# Altium PCB upBusSim.PcbDoc
Units mil, origin at the board's own origin, x right, y up, seen from the top; angles counter-clockwise.
Board outline 8772.5 x 6000.62 mil, 2 copper layers (Top Layer, Bottom Layer); 127 components, 134 nets, 554 pads, 0 vias.
Unrouted connection lines stored in the file: 187.
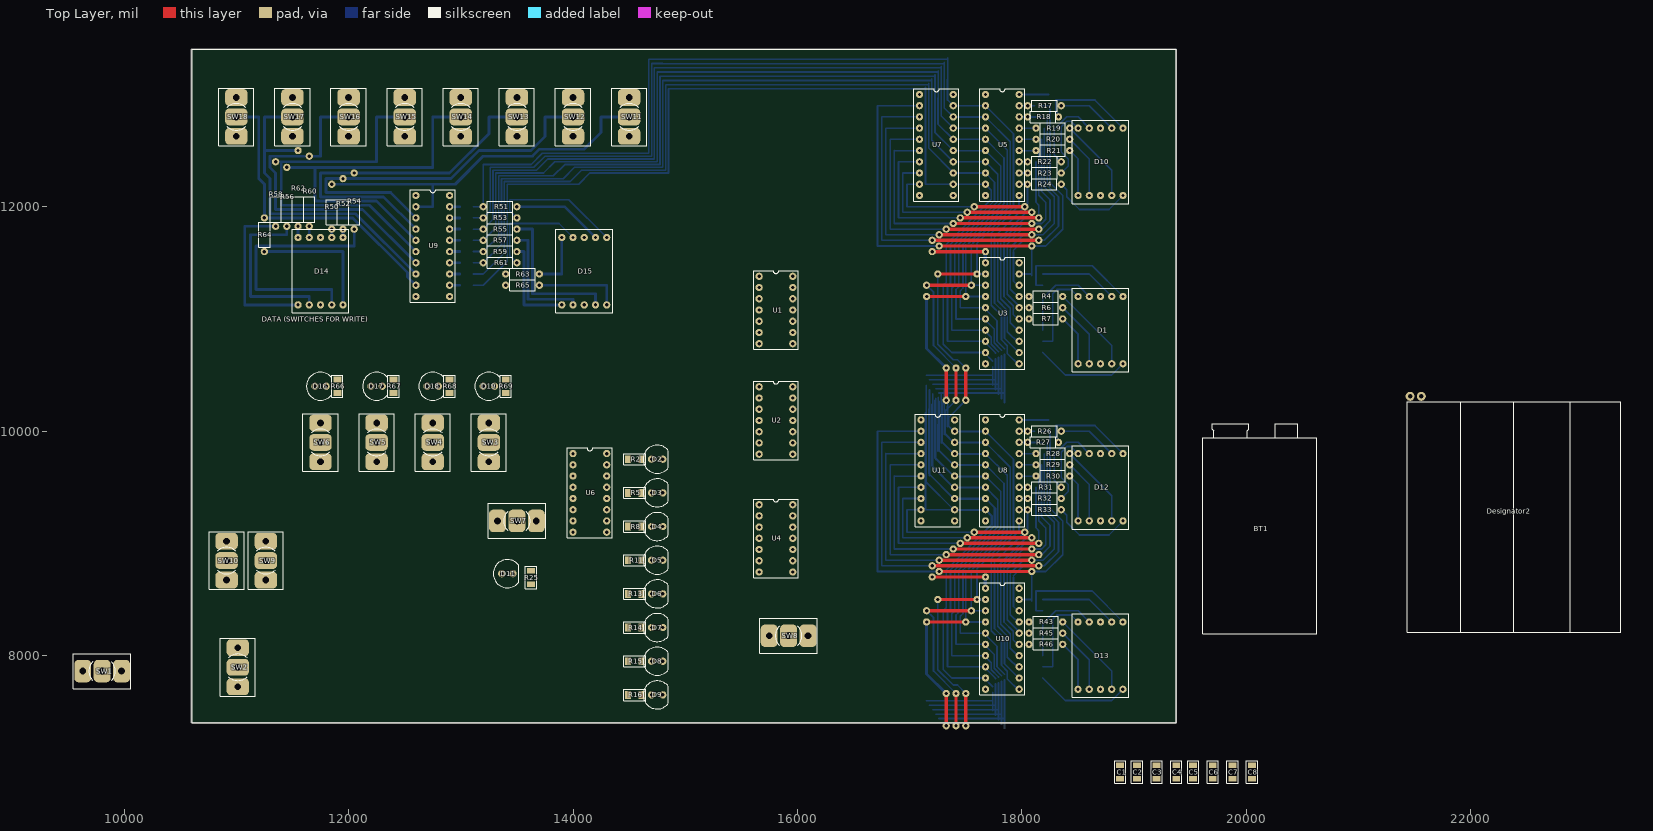
[diagram p0: Top Layer view]
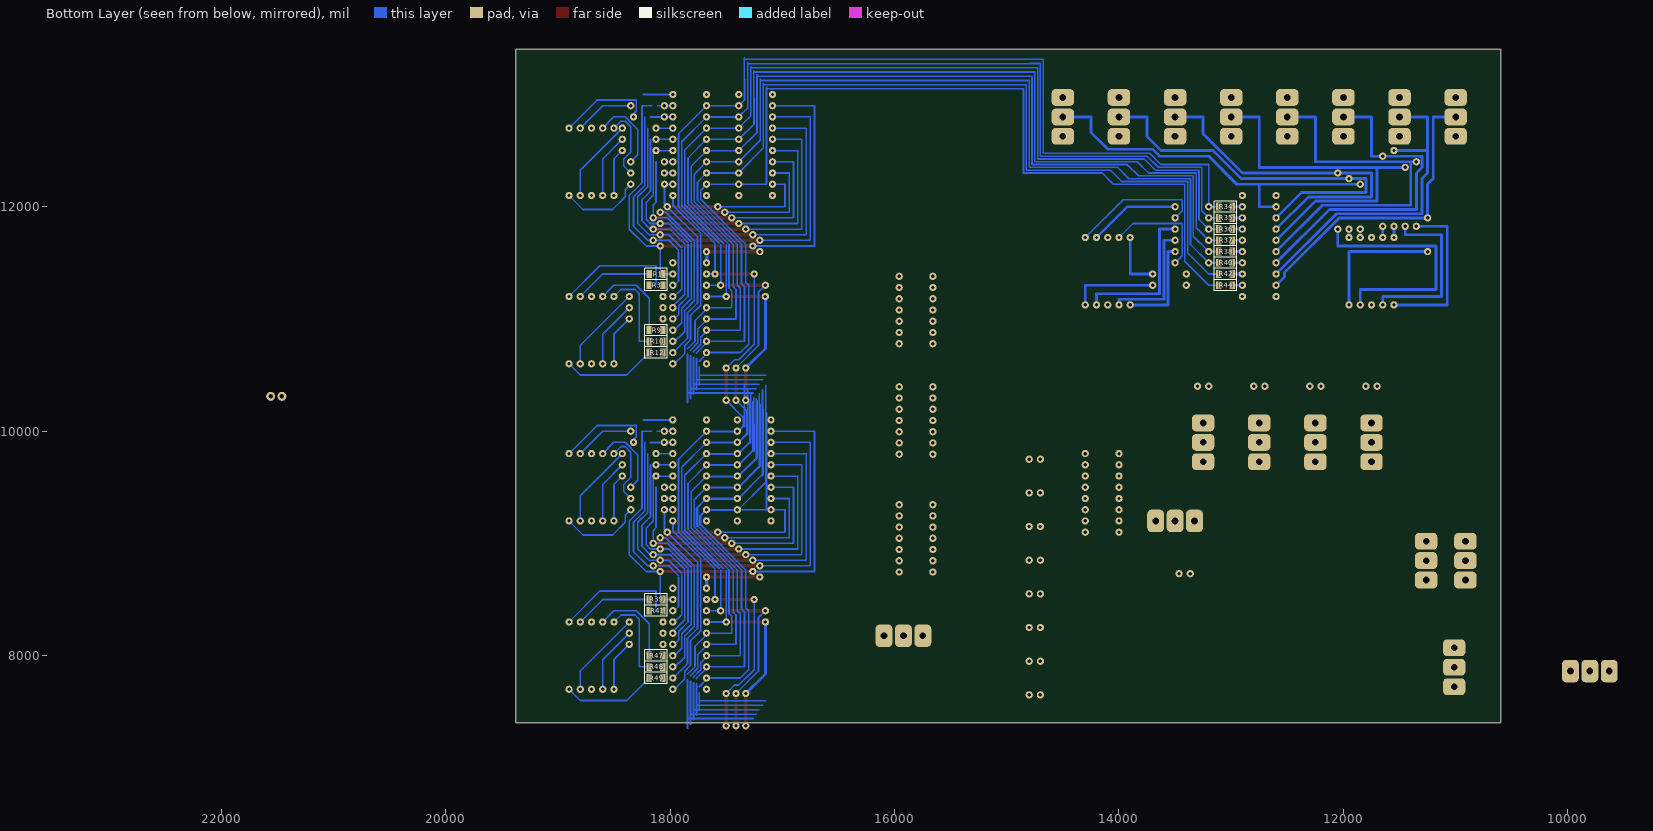
[diagram p1: Bottom Layer view, seen from below]

## Layer stack, top to bottom
Top Layer: signal copper 1.4
Dielectric: dielectric 12.6, FR-4, Dk 4.8
Bottom Layer: signal copper 1.4

## Board outline
10600,7400 19372.5,7402.5 19372.5,13400.62 10600,13400.62

## Design rules (kind name [scope] priority, off if disabled: settings)
Clearance [All] p1: gap=10
PolygonConnect [All] p1: connectstyle=Relief reliefconductorwidth=10 reliefentries=4 polygonreliefangle="90 Angle"
RoutingVias [All] p1: holewidth=28 width=50 viastyle="Through Hole" minholewidth=28 minwidth=50 maxholewidth=28 maxwidth=50
SilkscreenOverComponentPads [All] p1: minsilkscreentomaskgap=10
SolderMaskExpansion [All] p1: expansion=4
Width [All] p1: maxlimit=300 minlimit=10 preferedwidth=20
27 further rules are at their usual default settings.

## Components (designator, comment, footprint, x,y, rotation, side; value= is the part's Value field where it differs from the comment)
BT1 "Battery 9V" BAT_9V 19608.75,10066.88 r0 top
C1 "Cap" c1206 18875,6962.5 r90 top
C2 "Cap" c1206 19025,6962.5 r90 top
C3 "Cap" c1206 19200,6962.5 r90 top
C4 "Cap" c1206 19375,6962.5 r90 top
C5 "Cap" c1206 19525,6962.5 r90 top
C6 "Cap" c1206 19700,6962.5 r90 top
C7 "Cap" c1206 19875,6962.5 r90 top
C8 "Cap" c1206 20050,6962.5 r90 top
D1 "DISP7CC" DISP7 18700,10900 r0 top
D2 "LED" "LED5mm ROJO" 14750,9750 r0 top
D3 "LED" "LED5mm ROJO" 14750,9450 r0 top
D4 "LED" "LED5mm ROJO" 14750,9150 r0 top
D5 "LED" "LED5mm ROJO" 14750,8850 r0 top
D6 "LED" "LED5mm ROJO" 14750,8550 r0 top
D7 "LED" "LED5mm ROJO" 14750,8250 r0 top
D8 "LED" "LED5mm ROJO" 14750,7950 r0 top
D9 "LED" "LED5mm ROJO" 14750,7650 r0 top
D10 "DISP7CC" DISP7 18700,12400 r0 top
D11 "LED" "LED5mm ROJO" 13415,8730 r0 top
D12 "DISP7CC" DISP7 18700,9500 r0 top
D13 "DISP7CC" DISP7 18699.38,7999.38 r0 top
D14 "DISP7CC" DISP7 11750,11425 r0 top
D15 "DISP7CC" DISP7 14100,11425 r0 top
D16 "LED" "LED5mm ROJO" 11750,10400 r0 top
D17 "LED" "LED5mm ROJO" 12250,10400 r0 top
D18 "LED" "LED5mm ROJO" 12750,10400 r0 top
D19 "LED" "LED5mm ROJO" 13250,10400 r0 top
Designator2 "Comment" BAT_4AAA 21433.12,10185 r0 top
R1 "Res" R1206 18125,11400 r0 bottom
R2 "Res" R1206 14550,9750 r180 top
R3 "Res" R1206 18125,11300 r0 bottom
R4 "Res" RES300TH#1 18212.5,11200 r0 top
R5 "Res" R1206 14550,9450 r180 top
R6 "Res" RES300TH#1 18212.5,11100 r0 top
R7 "Res" RES300TH#1 18212.5,11000 r0 top
R8 "Res" R1206 14550,9150 r180 top
R9 "Res" R1206 18125,10900 r0 bottom
R10 "Res" R1206 18125,10800 r0 bottom
R11 "Res" R1206 14550,8850 r180 top
R12 "Res" R1206 18125,10700 r0 bottom
R13 "Res" R1206 14550,8550 r180 top
R14 "Res" R1206 14550,8250 r180 top
R15 "Res" R1206 14550,7950 r180 top
R16 "Res" R1206 14550,7650 r180 top
R17 "Res" RES300TH#1 18200,12900 r0 top
R18 "Res" RES300TH#2 18187.5,12800 r0 top
R19 "Res" RES300TH#1 18275,12700 r0 top
R20 "Res" RES300TH#1 18275,12600 r0 top
R21 "Res" RES300TH#1 18275,12500 r0 top
R22 "Res" RES300TH#1 18200,12400 r0 top
R23 "Res" RES300TH#1 18200,12300 r0 top
R24 "Res" RES300TH#3 18199.38,12199.38 r0 top
R25 "Res" R1206 13625,8695 r90 top
R26 "Res" RES300TH#1 18200,10000 r0 top
R27 "Res" RES300TH#2 18187.5,9900 r0 top
R28 "Res" RES300TH#1 18275,9800 r0 top
R29 "Res" RES300TH#1 18275,9700 r0 top
R30 "Res" RES300TH#1 18275,9600 r0 top
R31 "Res" RES300TH#1 18200,9500 r0 top
R32 "Res" RES300TH#1 18200,9400 r0 top
R33 "Res" RES300TH#1 18200,9300 r0 top
R34 "Res" R1206 13050,12000 r0 bottom
R35 "Res" R1206 13050,11900 r0 bottom
R36 "Res" R1206 13050,11800 r0 bottom
R37 "Res" R1206 13050,11700 r0 bottom
R38 "Res" R1206 13050,11600 r0 bottom
R39 "Res" R1206 18125,8500 r0 bottom
R40 "Res" R1206 13050,11500 r0 bottom
R41 "Res" R1206 18125,8400 r0 bottom
R42 "Res" R1206 13050,11400 r0 bottom
R43 "Res" RES300TH#1 18212.5,8300 r0 top
R44 "Res" R1206 13050,11300 r0 bottom
R45 "Res" RES300TH#1 18212.5,8200 r0 top
R46 "Res" RES300TH#1 18212.5,8100 r0 top
R47 "Res" R1206 18125,8000 r0 bottom
R48 "Res" R1206 18125,7900 r0 bottom
R49 "Res" R1206 18125,7800 r0 bottom
R50 "Res" RES300TH#4 11850,11950 r270 top
R51 "Res" RES300TH#1 13350,12000 r0 top
R52 "Res" RES300TH#5 11950,11950 r270 top
R53 "Res" RES300TH#1 13350,11900 r0 top
R54 "Res" RES300TH#6 12050,11950 r270 top
R55 "Res" RES300TH#1 13350,11800 r0 top
R56 "Res" RES300TH#7 11450,11975 r270 top
R57 "Res" RES300TH#1 13350,11700 r0 top
R58 "Res" RES300TH#8 11350,11975 r270 top
R59 "Res" RES300TH#1 13350,11600 r0 top
R60 "Res" RES300TH#9 11650,11975 r270 top
R61 "Res" RES300TH#1 13350,11500 r0 top
R62 "Res" RES300TH#10 11550,11975 r270 top
R63 "Res" RES300TH#1 13550,11400 r0 top
R64 "Res" RES300TH#1 11250,11750 r270 top
R65 "Res" RES300TH#1 13550,11300 r0 top
R66 "Res" R1206 11900,10400 r270 top
R67 "Res" R1206 12400,10400 r270 top
R68 "Res" R1206 12900,10400 r270 top
R69 "Res" R1206 13400,10400 r270 top
SW1 "SW2C" SW_PAL_1P2T_PCB 9804.38,7861.88 r90 top
SW2 "SW2C" SW_PAL_1P2T_PCB 11013.12,7896.25 r180 top
SW3 "SW2C" SW_PAL_1P2T_PCB 13250,9900 r180 top
SW4 "SW2C" SW_PAL_1P2T_PCB 12750,9900 r180 top
SW5 "SW2C" SW_PAL_1P2T_PCB 12250,9900 r180 top
SW6 "SW2C" SW_PAL_1P2T_PCB 11750,9900 r180 top
SW7 "SW2C" SW_PAL_1P2T_PCB 13500,9200 r90 top
SW8 "SW2C" SW_PAL_1P2T_PCB 15920.62,8176.88 r90 top
SW9 "SW2C" SW_PAL_1P2T_PCB 11263.12,8846.25 r180 top
SW10 "SW2C" SW_PAL_1P2T_PCB 10913.12,8846.25 r180 top
SW11 "SW2C" SW_PAL_1P2T_PCB 14500,12800 r180 top
SW12 "SW2C" SW_PAL_1P2T_PCB 14000,12800 r180 top
SW13 "SW2C" SW_PAL_1P2T_PCB 13500,12800 r180 top
SW14 "SW2C" SW_PAL_1P2T_PCB 13000,12800 r180 top
SW15 "SW2C" SW_PAL_1P2T_PCB 12500,12800 r180 top
SW16 "SW2C" SW_PAL_1P2T_PCB 12000,12800 r180 top
SW17 "SW2C" SW_PAL_1P2T_PCB 11500,12800 r180 top
SW18 "SW2C" SW_PAL_1P2T_PCB 11000,12800 r180 top
U1 "74HC04" DIP14Z 15658.12,11379.38 r0 top
U2 "74HC00" DIP14Z 15658.12,10395 r0 top
U3 "74HC573" DIP20Z 17675,11500 r0 top
U4 "74HC08" DIP14Z 15658.12,9345 r0 top
U5 "74HC573" DIP20Z 17675,13000 r0 top
U6 "74HC138" DIP16Z 14000,9800 r0 top
U7 "74HC573" DIP20Z 17087.5,13000 r0 top
U8 "74HC573" DIP20Z 17675,10100 r0 top
U9 "74HC573" DIP20Z 12600,12100 r0 top
U10 "74HC573" DIP20Z 17675,8600 r0 top
U11 "74HC573" DIP20Z 17100,10100 r0 top

## Footprints (in the part's own frame and the unit in brackets; to place one, negate y for a bottom-side part, rotate by r counter-clockwise, add the part's x,y. Pads: shape width x height; smd on the part's side, far side on the other; paste and mask are expansions set on the pad)
BAT_4AAA [mil]
  round 80 hole 40: 1(25,125) 2(125,125)
  silkscreen extent 0,-1975 1900,75
BAT_9V [mil]
  silkscreen extent 0,-1874 1016,0, body extent 0,-1874 1016,0, height 656
c1206 [mil]
  rect 50x70 smd: 1(-60,0) 2(60,0)
  silkscreen extent -100,-50 100,50, body extent -63,-31 63,32, height 33
DIP14Z [mil] "ZOCALO DIP14"
  round 65 hole 30: 1(0,0) 2(0,-100) 3(0,-200) 4(0,-300) 5(0,-400) 6(0,-500) 7(0,-600) 8(300,-600) 9(300,-500) 10(300,-400) 11(300,-300) 12(300,-200) 13(300,-100) 14(300,0)
  silkscreen extent -50,-650 350,50, body extent -47,-650 347,50, height 200
DIP16Z [mil] "ZOCALO DIP16"
  round 65 hole 30: 1(0,0) 2(0,-100) 3(0,-200) 4(0,-300) 5(0,-400) 6(0,-500) 7(0,-600) 8(0,-700) 9(300,-700) 10(300,-600) 11(300,-500) 12(300,-400) 13(300,-300) 14(300,-200) 15(300,-100) 16(300,0)
  silkscreen extent -50,-750 350,50, body extent -50,-750 350,50, height 341
DIP20Z [mil]
  round 65 hole 30: 1(0,0) 2(0,-100) 3(0,-200) 4(0,-300) 5(0,-400) 6(0,-500) 7(0,-600) 8(0,-700) 9(0,-800) 10(0,-900) 11(300,-900) 12(300,-800) 13(300,-700) 14(300,-600) 15(300,-500) 16(300,-400) 17(300,-300) 18(300,-200) 19(300,-100) 20(300,0)
  silkscreen extent -50,-950 350,50, body extent -50,-972 350,73, height 326
DISP7 [mil] "DISPLAY 7 SEGMENTOS"
  round 65 hole 30: 1(-200,-300) 2(-100,-300) 3(0,-300) 4(100,-300) 5(200,-300) 6(200,300) 7(100,300) 8(0,300) 9(-100,300) 10(-200,300)
  silkscreen extent -252,-372 252,372, body extent -248,-373 248,375, height 319
"LED5mm ROJO" [mil] "LED 5MM"
  round 65 hole 30: 1(-50,0) 2(50,0)
  silkscreen extent -125,-125 100,125, body extent -116,-116 99,116, height 339
R1206 [mil]
  rect 50x70 smd: 1(-60,0) 2(60,0)
  silkscreen extent -100,-50 100,50, body extent -63,-31 63,31, height 34
RES300TH#1 [mil] "RESISTENCIA THROUGH-HOLE"
  round 65 hole 30: 1(-150,0) 2(150,0)
  silkscreen extent -112,-50 112,50, body extent -159,-47 162,47, height 98
RES300TH#2 [mil] "RESISTENCIA THROUGH-HOLE"
  round 65 hole 30: 1(-137.5,0) 2(137.5,0)
  silkscreen extent -112,-50 112,50, body extent -159,-47 162,47, height 98
RES300TH#3 [mil] "RESISTENCIA THROUGH-HOLE"
  round 65 hole 30: 1(-150,0) 2(150.62,0.62)
  silkscreen extent -112,-50 112,50, body extent -159,-47 162,47, height 98
RES300TH#4 [mil] "RESISTENCIA THROUGH-HOLE"
  round 65 hole 30: 1(-250,0) 2(150,0)
  silkscreen extent -113,-50 113,50, body extent -159,-47 162,47, height 98
RES300TH#5 [mil] "RESISTENCIA THROUGH-HOLE"
  round 65 hole 30: 1(-300,0) 2(150,0)
  silkscreen extent -113,-50 113,50, body extent -159,-47 162,47, height 98
RES300TH#6 [mil] "RESISTENCIA THROUGH-HOLE"
  round 65 hole 30: 1(-350,0) 2(150,0)
  silkscreen extent -113,-50 113,50, body extent -159,-47 162,47, height 98
RES300TH#7 [mil] "RESISTENCIA THROUGH-HOLE"
  round 65 hole 30: 1(-375,0) 2(150,0)
  silkscreen extent -113,-50 113,50, body extent -159,-47 162,47, height 98
RES300TH#8 [mil] "RESISTENCIA THROUGH-HOLE"
  round 65 hole 30: 1(-425,0) 2(150,0)
  silkscreen extent -113,-50 113,50, body extent -159,-47 162,47, height 98
RES300TH#9 [mil] "RESISTENCIA THROUGH-HOLE"
  round 65 hole 30: 1(-475,0) 2(150,0)
  silkscreen extent -113,-50 113,50, body extent -159,-47 162,47, height 98
RES300TH#10 [mil] "RESISTENCIA THROUGH-HOLE"
  round 65 hole 30: 1(-525,0) 2(150,0)
  silkscreen extent -113,-50 113,50, body extent -159,-47 162,47, height 98
SW_PAL_1P2T_PCB [mil] "PADS SEPARADOS 4.4MM"
  rrect50% 200x150 hole 60: 1(0,173.23) 2(0,0) 3(0,-173.23)
  silkscreen extent -157,-257 157,257, body extent -156,-256 159,256, height 1142

## Part data
C1 C2 C3 C4 C5 C6 C7 C8: "Capacitor"
D1 D10 D12 D13 D14 D15: "CC 7-Segment Display"
D2 D3 D4 D5 D6 D7 D8 D9 D11 D16 D17 D18 D19: "Led"
R1 R2 R3 R4 R5 R6 R7 R8 R9 R10 R11 R12 R13 R14 R15 R16 R17 R18 R19 R20 R21 R22 R23 R24 R25 R26 R27 R28 R29 R30 R31 R32 R33 R34 R35 R36 R37 R38 R39 R40 R41 R42 R43 R44 R45 R46 R47 R48 R49 R50 R51 R52 R53 R54 R55 R56 R57 R58 R59 R60 R61 R62 R63 R64 R65 R66 R67 R68 R69: "Resistencia"
SW1 SW2 SW3 SW4 SW5 SW6 SW7 SW8 SW9 SW10 SW11 SW12 SW13 SW14 SW15 SW16 SW17 SW18: "Switch de 2 posiciones"
U1: "Hex Inverter"
U2: "Quad 2-Input NAND Gate"
U3 U5 U7 U8 U9 U10 U11: "Octal Transparent D-Type Latches with 3-State Outputs"
U4: "Quad 2-Input AND Gate"
U6: "3-Line to 8-Line Decoder / Demultiplexer"

## Free pads (board coordinates)
  round 65 hole 30: 2(17575,9100) 2(17575,12000) 3(17512.5,9050) 3(17512.5,11950) 4(17450,9000) 4(17450,11900) 5(17387.5,8950) 5(17387.5,11850) 6(17325,8900) 6(17325,11800) 7(17262.5,8850) 7(17262.5,11750) 8(17200,8800) 8(17200,11700) 9(17262.5,8750) 9(17262.5,11650) 10(18025,9100) 10(18025,12000) 11(18087.5,9050) 11(18087.5,11950) 12(18150,9000) 12(18150,11900) 13(18087.5,8750) 13(18087.5,8850) 13(18087.5,8950) 13(18087.5,11650) 13(18087.5,11750) 13(18087.5,11850) 13(18150,8800) 13(18150,8900) 13(18150,11700) 13(18150,11800) 14(17200,8700) 14(17200,11600) 14(17675,8700) 14(17675,11600) 15(17150,8300) 15(17150,8400) 15(17150,11200) 15(17150,11300) 15(17250,8500) 15(17250,11400) 15(17499.38,8300) 15(17499.38,11200) 15(17549.38,8400) 15(17549.38,11300) 15(17599.38,8500) 15(17599.38,11400) 16(17325,7375) 16(17325,7662.5) 16(17325,10275) 16(17325,10562.5) 17(17412.5,7375) 17(17412.5,7662.5) 17(17412.5,10275) 17(17412.5,10562.5) 18(17500,7375) 18(17500,7662.5) 18(17500,10275) 18(17500,10562.5)

## Nets (pads, with @x,y where several pads share a name; then routed paths per layer and width w, separated by ;. In a path a pad name is that pad's centre, name@x,y a point inside that pad or via, vN(x,y) a via of type N, cw(c..) or ccw(c..) an arc to the next point about the centre after c; other vN are vias at no path point)
#CS0: D2.2 U1.3 U6.15
#CS1: SW8.2 U1.11
#OE00: pad.14@17200,11600 pad.14@17675,11600 U2.3 U3.1 | length 575
  Top Layer w30: pad.14@17200,11600 pad.14@17675,11600
  Bottom Layer w30: U3.1@17674.38,11486.88 pad.14@17674.38,11586.88
#OE01: U2.6 U5.1
#OE10: U2.11 U8.1
#OE11: pad.14@17200,8700 pad.14@17675,8700 U2.8 U10.1 | length 575
  Top Layer w30: pad.14@17200,8700 pad.14@17675,8700
  Bottom Layer w30: U10.1@17674.38,8586.88 pad.14@17674.38,8686.88
#WR: SW10.2 U9.1
A0: R69.2 SW3.2 U1.1 U1.9 U2.4 U2.10
A1: R68.2 SW4.2 U6.1
A2: R67.2 SW5.2 U6.2
A3: R66.2 SW6.2 U6.3
D0: pad.15@17250,11400 pad.15@17599.38,11400 pad.18@17500,10275 pad.18@17500,10562.5 R34.2 R51.1 U3.2 U5.2 U7.19 U8.2 U10.2 U11.19 | length 10301.4
  Top Layer w30: pad.15@17250,11400 pad.15@17599.38,11400 ; pad.18@17500,10275 pad.18@17500,10562.5
  Bottom Layer w15: R34.2 R51.1 13200,12375 13625,12375 13725,12475 14675,12475 14675,13312.5 17337.5,13312.5 ; pad.15@17250,11400 17250,10775 17387.5,10637.5 17425,10637.5 pad.18@17500,10562.5 ; 17337.5,13325 17336.88,12951.25 U7.19@17386.88,12901.25 ; 17345,10120 pad.18@17500,10275 ; 17345,10132.5 17345,10047.5 U11.19@17395,9997.5 ; U7.19@17386.88,12899.38 17674.38,12899.38 17924.38,12649.38 17924.38,12174.38 ; U11.19@17395,9995.62 U8.2@17682.5,9995.62 ; 17599.38,11661.88 17599.38,11400 U3.2 ; 17599.38,11674.38 17924.38,11999.38 17924.38,12174.38 ; 17924.38,12149.38 17924.38,12174.38
D1: pad.15@17150,11300 pad.15@17250,8500 pad.15@17549.38,11300 pad.15@17599.38,8500 pad.17@17412.5,10275 pad.17@17412.5,10562.5 pad.18@17500,7375 pad.18@17500,7662.5 R35.2 R53.1 U3.3 U5.3 U7.18 U8.3 U10.3 U11.18 | length 14600.8
  Top Layer w30: pad.15@17150,11300 pad.15@17549.38,11300 ; pad.15@17250,8500 pad.15@17599.38,8500 ; pad.17@17412.5,10275 pad.17@17412.5,10562.5 ; pad.18@17500,7375 pad.18@17500,7662.5
  Bottom Layer w15: R35.2 R53.1 13262.5,11962.5 13262.5,12350 13650,12350 13750,12450 14700,12450 14700,13275 14800,13275 17308.75,13273.75 ; pad.15@17150,11300 17212.5,11237.5 17212.5,10762.5 pad.17@17412.5,10562.5 ; pad.15@17250,8500 17250,7875 17387.5,7737.5 17425,7737.5 pad.18@17500,7662.5 ; 17308.75,13286.25 17308.75,12879.38 U7.18@17386.88,12801.25 ; 17316.88,10179.38 pad.17@17412.5,10275 ; 17316.88,10191.88 17316.88,9975.62 U11.18@17395,9897.5 ; 17336.88,10038.75 17337.5,10412.5 ; 17336.88,10051.25 17386.88,10001.25 ; 17386.88,9999.38 17674.38,9999.38 17924.38,9749.38 17924.38,9274.38 ; U7.18@17386.88,12799.38 17674.38,12799.38 17896.25,12577.5 17896.25,12183.75 ; U11.18@17395,9895.62 U8.3@17682.5,9895.62 ; pad.15@17549.38,11300 17549.38,11661.88 ; pad.15@17561.88,11300 U3.3 ; 17561.88,11674.38 17896.25,12008.75 17896.25,12183.75 ; 17599.38,8761.88 17599.38,8500 17675,8500 ; 17599.38,8774.38 17924.38,9099.38 17924.38,9274.38 ; 17896.25,12136.88 17896.25,12183.75 ; 17924.38,9249.38 17924.38,9274.38
D2: pad.15@17150,8400 pad.15@17150,11200 pad.15@17499.38,11200 pad.15@17549.38,8400 pad.16@17325,10275 pad.16@17325,10562.5 pad.17@17412.5,7375 pad.17@17412.5,7662.5 R36.2 R55.1 U3.4 U5.4 U7.17 U8.4 U10.4 U11.17 | length 16878.4
  Top Layer w30: pad.15@17150,8400 pad.15@17549.38,8400 ; pad.15@17150,11200 pad.15@17499.38,11200 ; pad.16@17325,10275 pad.16@17325,10562.5 ; pad.17@17412.5,7375 pad.17@17412.5,7662.5
  Bottom Layer w15: R36.2 R55.1 13287.5,11887.5 13287.5,12325 13675,12325 13775,12425 14725,12425 14725,13237.5 17281.25,13237.5 ; pad.15@17150,8400 17212.5,8337.5 17212.5,7862.5 pad.17@17412.5,7662.5 ; 17280.62,9895 17281.25,10337.5 ; 17280.62,9907.5 U11.17@17386.88,9801.25 ; 17281.25,13250 17280.62,12807.5 U7.17@17386.88,12701.25 ; 17288.75,10238.75 pad.16@17325,10275 ; 17288.75,10251.25 17288.75,9903.75 U11.17@17395,9797.5 ; 17308.75,9966.88 17308.75,10373.75 ; 17308.75,9979.38 17386.88,9901.25 ; U11.17@17386.88,9799.38 17674.38,9799.38 17868.12,9605.62 17868.12,9293.12 ; 17386.88,9899.38 17674.38,9899.38 17896.25,9677.5 17896.25,9283.75 ; U7.17@17386.88,12699.38 17674.38,12699.38 17868.12,12505.62 17868.12,12193.12 ; U11.17@17395,9795.62 U8.4@17682.5,9795.62 ; pad.15@17499.38,11200 17499.38,11661.88 ; 17524.38,8774.38 17868.12,9118.12 17868.12,9293.12 ; pad.15@17524.38,11200 U3.4 ; 17524.38,11674.38 17868.12,12018.12 17868.12,12193.12 ; pad.15@17549.38,8400 17549.38,8761.88 ; pad.15@17561.88,8400 17675,8400 ; 17561.88,8774.38 17896.25,9108.75 17896.25,9283.75 ; 17868.12,9236.88 17868.12,9293.12 ; 17868.12,12136.88 17868.12,12193.12 ; 17896.25,9236.88 17896.25,9283.75
  Bottom Layer w25: pad.15@17150,11200 17150,10737.5 pad.16@17325,10562.5
D3: pad.15@17150,8300 pad.15@17499.38,8300 pad.16@17325,7375 pad.16@17325,7662.5 R37.2 R57.1 U3.5 U5.5 U7.16 U8.5 U10.5 U11.16 | length 12754.7
  Top Layer w30: pad.15@17150,8300 pad.15@17499.38,8300 ; pad.16@17325,7375 pad.16@17325,7662.5
  Bottom Layer w15: R37.2 R57.1 13312.5,11812.5 13312.5,12300 13737.5,12300 13837.5,12400 14750,12400 14750,13200 17253.12,13200 ; 17253.12,13212.5 17252.5,12735.62 U7.16@17386.88,12601.25 ; 17260.62,10264.38 17260.62,9831.88 U11.16@17395,9697.5 ; 17260.62,10339.38 17843.75,10339.38 ; U7.16@17386.88,12599.38 17674.38,12599.38 17840,12433.75 17840,12027.5 17475,11662.5 17475,11275 17449.38,11249.38 17449.38,11100 U3.5@17661.25,11100 ; U11.16@17395,9695.62 U8.5@17682.5,9695.62 ; pad.15@17499.38,8300 17499.38,8761.88 ; pad.15@17524.38,8300 17675,8300 ; U3.5 U3.5@17661.25,11100 ; 17843.75,10251.88 17843.75,10685 ; 17843.75,10735 17778.12,10800.62 17778.12,10983.12 U3.5@17661.25,11100
  Bottom Layer w25: pad.15@17150,8300 17150,7837.5 pad.16@17325,7662.5
D4: R38.2 R59.1 U3.6 U5.6 U7.15 U8.6 U10.6 U11.15 | length 14284.5
  Bottom Layer w15: R38.2 R59.1 13337.5,11737.5 13337.5,12275 13825,12275 13925,12375 14775,12375 14775,13162.5 17225,13162.5 ; 17225,13175 17224.38,12663.75 U7.15@17386.88,12501.25 ; 17232.5,9747.5 17232.5,10291.25 ; 17232.5,9760 U11.15@17395,9597.5 ; 17232.5,10378.75 17817.5,10378.75 ; 17252.5,9823.12 17253.12,10300 ; 17252.5,9835.62 17386.88,9701.25 ; 17386.88,9699.38 17674.38,9699.38 17840,9533.75 17840,9127.5 17475,8762.5 17475,8375 17449.38,8349.38 17449.38,8200 17661.25,8200 ; U7.15@17386.88,12499.38 17674.38,12499.38 17811.88,12361.88 17811.88,12199.38 ; U11.15@17395,9595.62 U8.6@17682.5,9595.62 ; 17675,8200 17661.25,8200 ; U3.6 U3.6@17661.25,11000 ; 17811.88,12211.88 17811.88,12199.38 ; 17817.5,10291.25 17817.5,10671.88 ; 17817.5,10721.88 17751.88,10787.5 17751.88,10909.38 U3.6@17661.25,11000 ; 17843.75,7835 17778.12,7900.62 17778.12,8083.12 17661.25,8200 ; U3.6@17661.25,11000 17411.88,11000 17411.88,11261.88 17437.5,11287.5 17437.5,11662.5 17811.88,12036.88 17811.88,12199.38
D5: R40.2 R61.1 U3.7 U5.7 U7.14 U8.7 U10.7 U11.14 | length 14416.9
  Bottom Layer w15: R40.2 R61.1 13362.5,11662.5 13362.5,12250 13912.5,12250 14012.5,12350 14800,12350 14800,13125 17196.88,13125 ; 17196.88,13137.5 17196.25,12591.88 U7.14@17386.88,12401.25 ; 17204.38,9675.62 17204.38,10330.62 ; 17204.38,9688.12 U11.14@17395,9497.5 ; 17204.38,10418.12 17791.25,10418.12 ; 17225,10275 17224.38,9763.75 17386.88,9601.25 ; 17386.88,9599.38 17674.38,9599.38 17811.88,9461.88 17811.88,9299.38 ; U7.14@17386.88,12399.38 17674.38,12399.38 17783.75,12290 17783.75,12046.25 17400,11662.5 17400,11300 17374.38,11274.38 17374.38,10900 U3.7@17661.25,10900 ; U11.14@17395,9495.62 U8.7@17682.5,9495.62 ; 17675,8100 17661.25,8100 ; U3.7 U3.7@17661.25,10900 ; 17791.25,10330.62 17791.25,10658.75 ; 17791.25,10708.75 17725.62,10774.38 17725.62,10835.62 U3.7@17661.25,10900 ; 17811.88,9311.88 17811.88,9299.38 ; 17817.5,7821.88 17751.88,7887.5 17751.88,8009.38 17661.25,8100 ; 17661.25,8100 17411.88,8100 17411.88,8361.88 17437.5,8387.5 17437.5,8762.5 17811.88,9136.88 17811.88,9299.38
D6: R42.2 R63.1 U3.8 U5.8 U7.13 U8.8 U10.8 U11.13 | length 14813.3
  Bottom Layer w15: R42.2 13200,11400 13387.5,11587.5 13387.5,12225 13975,12225 14075,12325 14825,12325 14825,13087.5 17168.75,13087.5 ; 17168.75,13100 17168.12,12523.12 U7.13@17386.88,12301.25 ; 17176.25,9603.75 17176.25,10370 ; 17176.25,9616.25 U11.13@17395,9397.5 ; 17176.25,10457.5 17765,10457.5 ; 17196.88,10237.5 17196.25,9691.88 17386.88,9501.25 ; 17386.88,9499.38 17674.38,9499.38 17783.75,9390 17783.75,9146.25 17400,8762.5 17400,8400 17374.38,8374.38 17374.38,8000 17661.25,8000 ; U7.13@17386.88,12299.38 17674.38,12299.38 17755.62,12218.12 17755.62,12055.62 17362.5,11662.5 17362.5,11312.5 17336.88,11286.88 17336.88,10800 U3.8@17661.25,10800 ; U11.13@17395,9395.62 17682.5,9395.62 17763.75,9314.38 17763.75,9151.88 ; 17675,8000 17661.25,8000 ; U3.8 U3.8@17661.25,10800 ; 17765,10370 17765,10646.25 ; 17765,10696.25 U3.8@17661.25,10800 ; 17791.25,7808.75 17725.62,7874.38 17725.62,7935.62 17661.25,8000
D7: R44.2 R65.1 U3.9 U5.9 U7.12 U8.9 U10.9 U11.12 | length 14994.4
  Bottom Layer w15: R44.2 13200,11300 13412.5,11512.5 13412.5,12200 14050,12200 14150,12300 14850,12300 14850,13050 17140.62,13050 ; 17140.62,13062.5 17140.62,12200 U7.12 ; 17148.12,9531.88 17148.12,10409.38 ; 17148.12,9544.38 U11.12@17395,9297.5 ; 17148.12,10496.88 17738.75,10496.88 ; 17168.75,10200 17168.12,9623.12 17386.88,9401.25 ; 17386.88,9399.38 17674.38,9399.38 17755.62,9318.12 17755.62,9155.62 17362.5,8762.5 17362.5,8412.5 17336.88,8386.88 17336.88,7900 17661.25,7900 ; U7.12@17386.88,12199.38 17674.38,12199.38 17727.5,12146.25 ; U11.12@17395,9295.62 17682.5,9295.62 17735.62,9242.5 ; 17675,7900 17661.25,7900 ; U3.9 U3.9@17661.25,10700 ; 17727.5,12111.88 17727.5,12146.25 ; 17735.62,9161.25 17735.62,9242.5 ; 17735.62,9208.12 17735.62,9242.5 ; 17738.75,10409.38 17738.75,10572.5 ; 17738.75,10622.5 U3.9@17661.25,10700 ; 17765,7796.25 17661.25,7900 ; U3.9@17661.25,10700 17375,10700 17299.38,10775.62 17299.38,11299.38 17325,11325 17325,11662.5 17727.5,12065 17727.5,12146.25
GND: C1.1 C2.1 C3.1 C4.1 C5.1 C6.1 C7.1 C8.1 D1.8 D10.8 D11.2 D12.8 D13.8 D14.3 D15.3 D16.2 D17.2 D18.2 D19.2 SW7.3 U1.7 U2.7 U3.10 U4.7 U5.10 U6.4 U6.5 U6.8 U7.10 U8.10 U9.10 U10.10 U11.10 | length 4694.8
  Bottom Layer w15: 17140.62,10162.5 17140.62,9300 17387.5,9300 ; 17386.88,9299.38 17674.38,9299.38 17727.5,9246.25 ; 17675,7800 17661.25,7800 ; 17727.5,9211.88 17727.5,9246.25 ; 17738.75,7722.5 17661.25,7800 ; 18185,8400 18125,8400 18125,8575 18625,8575 18900,8300 ; 17661.25,7800 17375,7800 17299.38,7875.62 17299.38,8399.38 17325,8425 17325,8762.5 17727.5,9165 17727.5,9246.25
NetD1_1: D1.1 R7.2 | length 457
  Bottom Layer w15: R7.2 18500,10862.5 D1.1
NetD1_2: D1.2 R6.2 | length 598.4
  Bottom Layer w15: R6.2 18600,10862.5 D1.2
NetD1_4: D1.4 R4.2 | length 781.2
  Bottom Layer w15: R4.2 18800,10762.5 D1.4
NetD1_5: D1.5 R12.2 | length 839.3
  Bottom Layer w15: R12.2 18385,10500 18800,10500 D1.5
NetD1_6: D1.6 R3.2 | length 1123.9
  Bottom Layer w15: R3.2 18125,11300 18125,11475 18625,11475 D1.6
NetD1_7: D1.7 R1.2 | length 697.8
  Bottom Layer w15: R1.2 18600,11400 D1.7
NetD1_9: D1.9 R9.2 | length 789.1
  Bottom Layer w15: R9.2 18185,11185 18300,11300 18500,11300 D1.9
NetD1_10: D1.10 R10.2 | length 781.4
  Bottom Layer w15: R10.2 18275,10800 18275,11225 18312.5,11262.5 18437.5,11262.5 D1.10
NetD2_1: D2.1 R2.1
NetD3_1: D3.1 R5.1
NetD3_2: D3.2 SW8.1 U6.14
NetD4_1: D4.1 R8.1
NetD4_2: D4.2 SW8.3 U6.13
NetD5_1: D5.1 R11.1
NetD5_2: D5.2 U6.12
NetD6_1: D6.1 R13.1
NetD6_2: D6.2 U6.11
NetD7_1: D7.1 R14.1
NetD7_2: D7.2 U6.10
NetD8_1: D8.1 R15.1
NetD8_2: D8.2 U6.9
NetD9_1: D9.1 R16.1
NetD9_2: D9.2 U6.7
NetD10_1: D10.1 R21.2 | length 431.1
  Bottom Layer w15: R21.2 18500,12425 D10.1
NetD10_2: D10.2 R20.2 | length 572.5
  Bottom Layer w15: R20.2 18600,12425 D10.2
NetD10_4: D10.4 R19.2 | length 755.3
  Bottom Layer w15: R19.2 18800,12325 D10.4
NetD10_5: D10.5 R24.2 | length 731.6
  Bottom Layer w15: R24.2 18400,12150 18400,12087.5 18512.5,11975 18662.5,11975 18775,11975 D10.5
NetD10_6: D10.6 R18.2 | length 874.3
  Bottom Layer w15: R18.2@18350,12800 18300,12850 18300,12950 18650,12950 D10.6
NetD10_7: D10.7 R17.2 | length 532.8
  Bottom Layer w15: R17.2 18600,12900 D10.7
NetD10_9: D10.9 R22.2 | length 713.9
  Bottom Layer w15: R22.2 18287.5,12462.5 18287.5,12687.5 18400,12800 18500,12800 D10.9
NetD10_10: D10.10 R23.2 | length 660.9
  Bottom Layer w15: R23.2 18412.5,12362.5 18412.5,12425 18350,12487.5 18350,12712.5 18400,12762.5 18437.5,12762.5 D10.10
NetD11_1: D11.1 R25.1
NetD12_1: D12.1 R30.2 | length 431.1
  Bottom Layer w15: R30.2 18500,9525 D12.1
NetD12_2: D12.2 R29.2 | length 572.5
  Bottom Layer w15: R29.2 18600,9525 D12.2
NetD12_4: D12.4 R28.2 | length 755.3
  Bottom Layer w15: R28.2 18800,9425 D12.4
NetD12_5: D12.5 R33.2 | length 731.6
  Bottom Layer w15: R33.2 18400,9250 18400,9187.5 18512.5,9075 18662.5,9075 18775,9075 D12.5
NetD12_6: D12.6 R27.2 | length 874.3
  Bottom Layer w15: R27.2@18350,9900 18300,9950 18300,10050 18650,10050 D12.6
NetD12_7: D12.7 R26.2 | length 532.8
  Bottom Layer w15: R26.2 18600,10000 D12.7
NetD12_9: D12.9 R31.2 | length 713.9
  Bottom Layer w15: R31.2 18287.5,9562.5 18287.5,9787.5 18400,9900 18500,9900 D12.9
NetD12_10: D12.10 R32.2 | length 660.9
  Bottom Layer w15: R32.2 18412.5,9462.5 18412.5,9525 18350,9587.5 18350,9812.5 18400,9862.5 18437.5,9862.5 D12.10
NetD13_1: D13.1 R46.2 | length 457
  Bottom Layer w15: R46.2 18500,7962.5 D13.1@18500,7700
NetD13_2: D13.2 R45.2 | length 598.4
  Bottom Layer w15: R45.2 18600,7962.5 D13.2@18600,7700
NetD13_4: D13.4 R43.2 | length 781.2
  Bottom Layer w15: R43.2 18800,7862.5 D13.4@18800,7700
NetD13_5: D13.5 R49.2
NetD13_6: D13.6 R41.2
NetD13_7: D13.7 R39.2
NetD13_9: D13.9 R47.2 | length 697.8
  Bottom Layer w15: 18185,8500 18600,8500 18800,8300
NetD13_10: D13.10 R48.2
NetD14_1: D14.1 R58.2 | length 1450
  Bottom Layer w25: R58.2 11075,11825 11075,11125 D14.1
NetD14_2: D14.2 R56.2 | length 1550
  Bottom Layer w25: R56.2 11450,11750 11125,11750 11125,11200 11650,11200 D14.2
NetD14_4: D14.4 R54.2 | length 2225
  Bottom Layer w25: D14.4 11850,11262.5 11175,11262.5 11175,11650 12050,11650 R54.2
NetD14_5: D14.5 R64.2 | length 1175
  Bottom Layer w25: R64.2 11950,11600 D14.5
NetD14_6: D14.6 R52.2 | length 75
  Bottom Layer w25: D14.6 R52.2
NetD14_7: D14.7 R50.2 | length 75
  Bottom Layer w25: D14.7 R50.2
NetD14_9: D14.9 R60.2 | length 100
  Bottom Layer w25: D14.9 R60.2
NetD14_10: D14.10 R62.2 | length 100
  Bottom Layer w25: D14.10 R62.2
NetD15_1: D15.1 R59.2 | length 875
  Bottom Layer w25: R59.2 13562.5,11600 13562.5,11125 D15.1
NetD15_2: D15.2 R57.2 | length 1075
  Bottom Layer w25: R57.2 13600,11700 13600,11175 14000,11175 D15.2
NetD15_4: D15.4 R55.2 | length 1375
  Bottom Layer w25: R55.2 13637.5,11800 13637.5,11225 14200,11225 D15.4
NetD15_5: D15.5 R65.2 | length 775
  Bottom Layer w25: R65.2 14300,11300 D15.5
NetD15_6: D15.6 R53.2 | length 1190.7
  Bottom Layer w15: R53.2 13437.5,11962.5 13437.5,12062.5 13962.5,12062.5 D15.6
NetD15_7: D15.7 R51.2 | length 813.9
  Bottom Layer w25: R51.2 13925,12000 D15.7
NetD15_9: D15.9 R61.2 | length 990.2
  Bottom Layer w15: R61.2 13437.5,11562.5 13437.5,11850 13875,11850 D15.9
NetD15_10: D15.10 R63.2 | length 525
  Bottom Layer w25: R63.2 13900,11400 D15.10
NetD16_1: D16.1 R66.1
NetD17_1: D17.1 R67.1
NetD18_1: D18.1 R68.1
NetD19_1: D19.1 R69.1
NetR1_1: pad.9@17262.5,11650 pad.13@18087.5,11650 R1.1 R17.1 U3.19 U5.19 U7.2 | length 5071.5
  Top Layer w30: pad.9@17262.5,11650 pad.13@18087.5,11650
  Bottom Layer w15: U7.2@17086.88,12899.38 16712.5,12900 16712.5,11650 pad.9@17262.5,11650 ; U3.19@17974.38,11399.38 R1.1@18087.5,11399.38 ; U5.19@17974.38,12899.38 18111.88,12899.38 ; R1.1@18087.5,11386.88 pad.13@18087.5,11637.5 ; pad.13@18087.5,11650 18212.5,11650 18362.5,11800 18362.5,12100 18249.38,12213.12 18249.38,12899.38 18161.88,12899.38
NetR3_1: pad.8@17200,11700 pad.13@18150,11700 R3.1 R18.1 U3.18 U5.18 U7.3 | length 4875
  Top Layer w30: pad.8@17200,11700 pad.13@18150,11700
  Bottom Layer w15: U7.3@17086.88,12799.38 16750,12800 16750,11700 pad.8@17200,11700 ; 17924.38,11599.38 17924.38,11336.88 U3.18@17974.38,11286.88 ; 17924.38,11611.88 18012.5,11700 18150,11700 18200,11700 18325,11825 18325,12087.5 18224.38,12188.12 18224.38,12799.38 ; U5.18@17974.38,12799.38 18174.38,12799.38
NetR4_1: pad.7@17262.5,11750 pad.13@18087.5,11750 R4.1 R19.1 U3.17 U5.17 U7.4 | length 4557.8
  Top Layer w30: pad.7@17262.5,11750 pad.13@18087.5,11750
  Bottom Layer w15: U7.4@17086.88,12699.38 16787.5,12700 16787.5,11750 pad.7@17262.5,11750 ; 17896.25,11621.25 17896.25,11265 U3.17@17974.38,11186.88 ; 17896.25,11633.75 18012.5,11750 18087.5,11750 18187.5,11750 18287.5,11850 18287.5,12087.5 18199.38,12175.62 18199.38,12699.38 ; U5.17@17974.38,12699.38 R19.1@18149.38,12699.38
NetR6_1: pad.6@17325,11800 pad.13@18150,11800 R6.1 R20.1 U3.16 U5.16 U7.5 | length 4346.7
  Top Layer w30: pad.6@17325,11800 pad.13@18150,11800
  Bottom Layer w15: U7.5@17086.88,12599.38 16825,12600 16825,11800 pad.6@17325,11800 ; 17868.12,11655.62 17868.12,11219.38 U3.16@17974.38,11113.12 ; 17868.12,11668.12 18000,11800 18150,11800 18175,11800 18250,11875 18250,12062.5 18174.38,12138.12 18174.38,12599.38 ; U5.16@17974.38,12599.38 R20.1@18124.38,12599.38
NetR7_1: pad.5@17387.5,11850 pad.13@18087.5,11850 R7.1 R21.1 U3.15 U5.15 U7.6 | length 4055.7
  Top Layer w30: pad.5@17387.5,11850 pad.13@18087.5,11850
  Bottom Layer w15: U7.6@17086.88,12499.38 16862.5,12500 16862.5,11850 pad.5@17387.5,11850 ; 17840,11665 17840,11200 17922.5,11117.5 17922.5,11038.75 U3.15@17974.38,10986.88 ; 17840,11677.5 18012.5,11850 18087.5,11850 18175,11850 18212.5,11887.5 18212.5,12037.5 18149.38,12100.62 R21.1@18149.38,12499.38 ; U5.15@17974.38,12499.38 R21.1@18099.38,12499.38
NetR9_1: pad.4@17450,11900 pad.12@18150,11900 R9.1 R22.1 U3.14 U5.14 U7.7 | length 3828.1
  Top Layer w30: pad.4@17450,11900 pad.12@18150,11900
  Bottom Layer w15: U7.7@17086.88,12399.38 16900,12400 16900,11900 pad.4@17450,11900 ; 17811.88,11674.38 17811.88,11180.62 17896.25,11096.25 17896.25,10965 U3.14@17974.38,10886.88 ; 17811.88,11686.88 18025,11900 18150,11900 18150,12012.5 18124.38,12038.12 18124.38,12399.38 ; U5.14@17974.38,12399.38 R22.1@18074.38,12399.38
NetR10_1: pad.3@17512.5,11950 pad.11@18087.5,11950 R10.1 R23.1 U3.13 U5.13 U7.8 | length 3190.1
  Top Layer w30: pad.3@17512.5,11950 pad.11@18087.5,11950
  Bottom Layer w15: U7.8@17086.88,12299.38 16937.5,12300 16937.5,11950 pad.3@17512.5,11950 ; 17783.75,11683.75 17783.75,11161.25 17870,11075 ; 17783.75,11696.25 18037.5,11950 pad.11@18087.5,11950 ; 17816.25,11128.75 17870,11075 ; U3.13@17974.38,10781.88 17870,10886.25 17870,11075 ; U5.13@17974.38,12299.38 R23.1@18049.38,12299.38
NetR12_1: pad.2@17575,12000 pad.10@18025,12000 R12.1 R24.1 U3.12 U5.12 U7.9 | length 3124.2
  Top Layer w30: pad.2@17575,12000 pad.10@18025,12000
  Bottom Layer w15: U7.9@17086.88,12199.38 16975,12200 16975,12000 pad.2@17575,12000 ; 17755.62,11718.12 17755.62,11141.88 17843.75,11053.75 17843.75,10826.88 17974.38,10696.25 U3.12@17974.38,10686.88 ; 17755.62,11730.62 18025,12000 18049.38,12024.38 R24.1 ; U5.12@17974.38,12199.38 R24.1@18024.38,12199.38
NetR25_2: R25.2 SW7.2 U6.6
NetR26_1: pad.9@17262.5,8750 pad.13@18087.5,8750 R26.1 R39.1 U8.19 U10.19 U11.2 | length 5071.5
  Top Layer w30: pad.9@17262.5,8750 pad.13@18087.5,8750
  Bottom Layer w15: U11.2@17086.88,9999.38 16712.5,10000 16712.5,8750 pad.9@17262.5,8750 ; U10.19@17974.38,8499.38 R39.1@18087.5,8499.38 ; U8.19@17974.38,9999.38 18111.88,9999.38 ; R39.1@18087.5,8486.88 pad.13@18087.5,8737.5 ; pad.13@18087.5,8750 18212.5,8750 18362.5,8900 18362.5,9200 18249.38,9313.12 18249.38,9999.38 18161.88,9999.38
NetR27_1: pad.8@17200,8800 pad.13@18150,8800 R27.1 R41.1 U8.18 U10.18 U11.3 | length 4875
  Top Layer w30: pad.8@17200,8800 pad.13@18150,8800
  Bottom Layer w15: U11.3@17086.88,9899.38 16750,9900 16750,8800 pad.8@17200,8800 ; 17924.38,8699.38 17924.38,8436.88 U10.18@17974.38,8386.88 ; 17924.38,8711.88 18012.5,8800 18150,8800 18200,8800 18325,8925 18325,9187.5 18224.38,9288.12 18224.38,9899.38 ; U8.18@17974.38,9899.38 18174.38,9899.38
NetR28_1: pad.7@17262.5,8850 pad.13@18087.5,8850 R28.1 R43.1 U8.17 U10.17 U11.4 | length 4557.8
  Top Layer w30: pad.7@17262.5,8850 pad.13@18087.5,8850
  Bottom Layer w15: U11.4@17086.88,9799.38 16787.5,9800 16787.5,8850 pad.7@17262.5,8850 ; 17896.25,8721.25 17896.25,8365 U10.17@17974.38,8286.88 ; 17896.25,8733.75 18012.5,8850 18087.5,8850 18187.5,8850 18287.5,8950 18287.5,9187.5 18199.38,9275.62 18199.38,9799.38 ; U8.17@17974.38,9799.38 R28.1@18149.38,9799.38
NetR29_1: pad.6@17325,8900 pad.13@18150,8900 R29.1 R45.1 U8.16 U10.16 U11.5 | length 4346.7
  Top Layer w30: pad.6@17325,8900 pad.13@18150,8900
  Bottom Layer w15: U11.5@17086.88,9699.38 16825,9700 16825,8900 pad.6@17325,8900 ; 17868.12,8755.62 17868.12,8319.38 U10.16@17974.38,8213.12 ; 17868.12,8768.12 18000,8900 18150,8900 18175,8900 18250,8975 18250,9162.5 18174.38,9238.12 18174.38,9699.38 ; U8.16@17974.38,9699.38 R29.1@18124.38,9699.38
NetR30_1: pad.5@17387.5,8950 pad.13@18087.5,8950 R30.1 R46.1 U8.15 U10.15 U11.6 | length 4055.7
  Top Layer w30: pad.5@17387.5,8950 pad.13@18087.5,8950
  Bottom Layer w15: U11.6@17086.88,9599.38 16862.5,9600 16862.5,8950 pad.5@17387.5,8950 ; 17840,8765 17840,8300 17922.5,8217.5 17922.5,8138.75 U10.15@17974.38,8086.88 ; 17840,8777.5 18012.5,8950 18087.5,8950 18175,8950 18212.5,8987.5 18212.5,9137.5 18149.38,9200.62 R30.1@18149.38,9599.38 ; U8.15@17974.38,9599.38 R30.1@18099.38,9599.38
NetR31_1: pad.4@17450,9000 pad.12@18150,9000 R31.1 R47.1 U8.14 U10.14 U11.7 | length 3828.1
  Top Layer w30: pad.4@17450,9000 pad.12@18150,9000
  Bottom Layer w15: U11.7@17086.88,9499.38 16900,9500 16900,9000 pad.4@17450,9000 ; 17811.88,8774.38 17811.88,8280.62 17896.25,8196.25 17896.25,8065 U10.14@17974.38,7986.88 ; 17811.88,8786.88 18025,9000 18150,9000 18150,9112.5 18124.38,9138.12 18124.38,9499.38 ; U8.14@17974.38,9499.38 R31.1@18074.38,9499.38
NetR32_1: pad.3@17512.5,9050 pad.11@18087.5,9050 R32.1 R48.1 U8.13 U10.13 U11.8 | length 3190.1
  Top Layer w30: pad.3@17512.5,9050 pad.11@18087.5,9050
  Bottom Layer w15: U11.8@17086.88,9399.38 16937.5,9400 16937.5,9050 pad.3@17512.5,9050 ; 17783.75,8783.75 17783.75,8261.25 17870,8175 ; 17783.75,8796.25 18037.5,9050 pad.11@18087.5,9050 ; 17816.25,8228.75 17870,8175 ; U10.13@17974.38,7881.88 17870,7986.25 17870,8175 ; U8.13@17974.38,9399.38 R32.1@18049.38,9399.38
NetR33_1: pad.2@17575,9100 pad.10@18025,9100 R33.1 R49.1 U8.12 U10.12 U11.9 | length 3124.2
  Top Layer w30: pad.2@17575,9100 pad.10@18025,9100
  Bottom Layer w15: U11.9@17086.88,9299.38 16975,9300 16975,9100 pad.2@17575,9100 ; 17755.62,8818.12 17755.62,8241.88 17843.75,8153.75 17843.75,7926.88 17974.38,7796.25 U10.12@17974.38,7786.88 ; 17755.62,8830.62 18025,9100 18049.38,9124.38 R33.1@18049.38,9299.38 ; U8.12@17974.38,9299.38 R33.1@18024.38,9299.38
NetR34_1: R34.1 U9.19 | length 90
  Bottom Layer w25: U9.19 R34.1
NetR35_1: R35.1 U9.18 | length 90
  Bottom Layer w25: U9.18 R35.1
NetR36_1: R36.1 U9.17 | length 90
  Bottom Layer w25: U9.17 R36.1
NetR37_1: R37.1 U9.16 | length 90
  Bottom Layer w25: U9.16 R37.1
NetR38_1: R38.1 U9.15 | length 90
  Bottom Layer w25: U9.15 R38.1
NetR40_1: R40.1 U9.14 | length 90
  Bottom Layer w25: U9.14 R40.1
NetR42_1: R42.1 U9.13 | length 90
  Bottom Layer w25: U9.13 R42.1
NetR44_1: R44.1 U9.12 | length 90
  Bottom Layer w25: U9.12 R44.1
NetR50_1: R50.1 SW11.2 U9.2 | length 3329.1
  Bottom Layer w25: R50.1 12750,12200 ; U9.2 12750,12000 12750,12200 ; SW11.2 14250,12800 14250,12662.5 14100,12512.5 13700,12512.5 13637.5,12450 13200,12450 12950,12200 12750,12200
NetR52_1: R52.1 SW12.2 U9.3 | length 3548.5
  Bottom Layer w25: U9.3 12375,12125 11800,12125 11800,12250 R52.1 12912.5,12250 13162.5,12500 13625,12500 13750,12625 13750,12800 SW12.2
NetR54_1: R54.1 SW13.2 U9.4 | length 3226.6
  Bottom Layer w25: U9.4 12312.5,12087.5 11750,12087.5 11750,12300 R54.1 12900,12300 13250,12650 13250,12800 SW13.2
NetR56_1: R56.1 SW14.2 U9.5 | length 3345
  Bottom Layer w25: R56.1 11700,12350 ; U9.5 12250,12050 11700,12050 11700,12350 ; SW14.2 12750,12800 12750,12350 11700,12350
NetR58_1: R58.1 SW15.2 U9.6 | length 3308.4
  Bottom Layer w25: R58.1 12250,12400 12250,12800 SW15.2 ; 11400,12400 11400,12012.5 12187.5,12012.5 U9.6
NetR60_1: R60.1 SW16.2 U9.7 | length 2992.5
  Bottom Layer w25: SW16.2 11750,12800 11750,12450 R60.1 11300,12450 11300,12350 11350,12300 11350,11975 12125,11975 U9.7
NetR62_1: R62.1 SW17.2 U9.8 | length 2955.9
  Bottom Layer w25: SW17.2 11250,12800 11250,12500 ; R62.1 11250,12500 ; U9.8 12062.5,11937.5 11300,11937.5 11300,12250 11250,12300 11250,12500
NetR64_1: R64.1 SW18.2 U9.9 | length 2741.2
  Bottom Layer w25: SW18.2 11200,12800 11200,12250 11250,12200 11250,12125 R64.1 12037.5,11900 12525,11412.5 12525,11375 U9.9
NetU1_2: U1.2 U2.1
NetU1_4: U1.4 U2.2 U2.5 U4.2 U4.5
NetU1_5: U1.5 U4.6
NetU1_6: U1.6 U7.1
NetU1_8: U1.8 U2.13
NetU1_10: U1.10 U2.9 U2.12 U4.10 U4.13
NetU1_12: U1.12 U11.1
NetU1_13: U1.13 U4.11
RD: SW2.2 U4.4 U4.12
VCC: C1.2 C2.2 C3.2 C4.2 C5.2 C6.2 C7.2 C8.2 R2.2 R5.2 R8.2 R11.2 R13.2 R14.2 R15.2 R16.2 SW7.1 U1.14 U2.14 U3.20 U4.14 U5.20 U6.16 U7.11 U7.20 U8.20 U9.11 U9.20 U10.20 U11.11 U11.20 | length 525
  Bottom Layer w20: U8.20@17974.38,10099.38 18236.88,10099.38 ; U5.20@17974.38,12999.38 18236.88,12999.38
WR: SW9.2 U4.1 U4.9
WR0: U3.11 U4.3 U5.11 | length 1704.5
  Bottom Layer w15: 17727.5,11752.5 17727.5,11122.5 17817.5,11032.5 17817.5,10813.75 17870,10761.25 17870,10691.25 U3.11@17974.38,10586.88 ; 17727.5,11765 17974.38,12011.88 U5.11@17974.38,12099.38
WR1: U4.8 U8.11 U10.11 | length 1704.5
  Bottom Layer w15: 17727.5,8852.5 17727.5,8222.5 17817.5,8132.5 17817.5,7913.75 17870,7861.25 17870,7791.25 U10.11@17974.38,7686.88 ; 17727.5,8865 17974.38,9111.88 U8.11@17974.38,9199.38
pads on no net: D1.3 D10.3 D12.3 D13.3 D14.8 D15.8 Designator2.1 Designator2.2 SW1.1 SW1.2 SW1.3 SW2.1 SW2.3 SW3.1 SW3.3 SW4.1 SW4.3 SW5.1 SW5.3 SW6.1 SW6.3 SW9.1 SW9.3 SW10.1 SW10.3 SW11.1 SW11.3 SW12.1 SW12.3 SW13.1 SW13.3 SW14.1 SW14.3 SW15.1 SW15.3 SW16.1 SW16.3 SW17.1 SW17.3 SW18.1 SW18.3
copper on no net: | length 6925.4
  Bottom Layer w15: 17148.12,7596.88 17738.75,7596.88 ; 17176.25,7557.5 17765,7557.5 ; 17204.38,7518.12 17791.25,7518.12 ; 17232.5,7478.75 17817.5,7478.75 ; 17260.62,7439.38 17843.75,7439.38 ; 17738.75,7509.38 17738.75,7672.5 ; 17765,7470 17765,7746.25 ; 17791.25,7430.62 17791.25,7758.75 ; 17817.5,7391.25 17817.5,7771.88 ; 17843.75,7351.88 17843.75,7785 ; 18185,7800 18385,7600 18800,7600 18900,7700 ; 18185,7900 18275,7900 18275,8325 18312.5,8362.5 18437.5,8362.5 18500,8300 ; 18185,8000 18185,8285 18300,8400 18500,8400 18600,8300

## Silkscreen, mask and mechanical layers (free items; w line width, h text height)
Top Overlay:
  lines w10: 10605,7402.5 10605,13400.62 19372.5,13400.62 19372.5,7402.5 10605,7402.5
  text "DATA (SWITCHES FOR WRITE)" at 11225,10975 h45

## Dimensions
10600,7400 to 19372.5,7402.5 on Top Overlay
10600,7400 to 10600,13400.62 on Top Overlay